# EAGLE board Sensor_post (EAGLE 7.6.0)

Size 160 x 100 mm. Coordinates in mm from the lower left corner, seen from the top.
Outline: 0,0 160,0 160,100 0,100 0,0
Copper layers (1*16): Top 0.035mm / dielectric 1.5mm / Bottom 0.035mm
Design rules "default": minimum track width 10mil, minimum drill 24mil, track to track 8mil, track to pad 8mil, pad to pad 8mil, via to via 8mil, smd to smd 8mil, copper to edge 40mil, drill to drill 8mil, minimum pad ring 10mil, minimum via ring 8mil, stop-mask expansion 4mil, vias tented up to drill 0mil, thermal gap 10mil

## Footprints (pad centres in the part's own frame; a part is rotated, then mirrored left to right if it is on the bottom)
E2,5-7 = drill 0.813 pad 1.778: + -1.27,0 | drill 0.813 pad 1.778 octagon: - 1.27,0
AB9V = drill 1.118 pad 3.15 octagon: + 0,2.54; - 0,-2.54
TO220V = drill 1.016 long: 1 -2.54,-2.54; 2 0,-2.54; 3 2.54,-2.54
NRF24L01 = drill 0.8: CE 3.75,3.75; CSN 1.25,3.75; IRQ 1.25,8.75; MISO 3.75,8.75; MOSI 1.25,6.25; SCK 3.75,6.25; VCC 1.25,1 | drill 0.8 square: GND 3.75,1
EG1218 = drill 0.9 pad 1.676: O -2.54,0; P 0,0; S 2.54,0
0207/10 = drill 0.813 pad 1.676 octagon: 1 -5.08,0; 2 5.08,0
CA9V = drill 1.321 long: A -2.54,-5.08; E 2.54,-5.08; S 0,5.08
10 = drill 0.813 pad 1.6 octagon: 1 -5.08,0; 2 5.08,0
NANO = drill 0.8 long: 3.3V -10.16,24.13; 5V -10.16,-1.27; A0 -10.16,19.05; A1 -10.16,16.51; A2 -10.16,13.97; A3 -10.16,11.43; A4 -10.16,8.89; A5 -10.16,6.35; A6 -10.16,3.81; A7 -10.16,1.27; AREF -10.16,21.59; D2 5.08,1.27; D3 5.08,3.81; D4 5.08,6.35; D5 5.08,8.89; D6 5.08,11.43; D7 5.08,13.97; D8 5.08,16.51; D9 5.08,19.05; D10 5.08,21.59; D11 5.08,24.13; D12 5.08,26.67; D13 -10.16,26.67; GND -10.16,-6.35; GND1 5.08,-1.27; RAW -10.16,-8.89; RST -10.16,-3.81; RST1 5.08,-3.81; RX1 5.08,-6.35; TX0 5.08,-8.89
LCD1602 = drill 0.8 long: 1 8,33.46; 2 10.54,33.46; 3 13.08,33.46; 4 15.62,33.46; 5 18.16,33.46; 6 20.7,33.46; 7 23.24,33.46; 8 25.78,33.46; 9 28.32,33.46; 10 30.86,33.46; 11 33.4,33.46; 12 35.94,33.46; 13 38.48,33.46; 14 41.02,33.46; 15 43.56,33.46; 16 46.1,33.46 | hole 2.8: 2.54,2.54; 2.54,33.46; 77.46,33.46; 77.46,2.54

## Placement (x,y rotation side)
C2  1uF  [E2,5-7]  -64.77,80.01 0 top  (outside the outline)
C3  1uF  [E2,5-7]  -74.93,80.01 0 top  (outside the outline)
C4  1uF  [E2,5-7]  -20.32,95.25 0 top  (outside the outline)
G1  11.1V  [AB9V]  -40.64,81.28 0 top  (outside the outline)
IC1  7809T  [TO220V]  -52.07,83.82 0 top  (outside the outline)
NRF24L1  NRF24L01  [NRF24L01]  -21.59,78.74 0 top  (outside the outline)
ON/OFF  [EG1218]  -30.48,93.98 0 top  (outside the outline)
R1  [0207/10]  -43.18,92.71 0 top  (outside the outline)
R2  [CA9V]  -27.94,83.82 0 top  (outside the outline)
SENSOR  J10MM  [10]  -55.88,92.71 0 top  (outside the outline)
U$1  NANO  [NANO]  -20.32,10.16 0 top  (outside the outline)
X1  HD44780LCD-1602  [LCD1602]  -93.98,39.37 0 top  (outside the outline)

## Library data of the parts
C2-C4 ON/OFF R1 X1 = adafruit
G1 = battery
IC1 = linear
NRF24L1 = nRF24L01
R2 = pot
SENSOR = jumper
U$1 = Arduino-clone

## Nets
3.3V: C4.+ NRF24L1.VCC U$1.3.3V
5V: R2.E SENSOR.2 U$1.5V X1.2 X1.15
9V: C2.+ IC1.3 U$1.RAW
CE: NRF24L1.CE U$1.D7
CSN: NRF24L1.CSN U$1.D8
D4: U$1.D2 X1.11
D5: U$1.D3 X1.12
D6: U$1.D4 X1.13
D7: U$1.D5 X1.14
E: U$1.D10 X1.6
GND: C2.- C3.- C4.- G1.- IC1.2 NRF24L1.GND ON/OFF.S R1.1 R2.A U$1.GND U$1.GND1 X1.1 X1.5 X1.16
MISO: NRF24L1.MISO U$1.D12
MOSI: NRF24L1.MOSI U$1.D11
N$1: C3.+ IC1.1 ON/OFF.P
N$2: R1.2 SENSOR.1 U$1.D6
N$3: R2.S X1.3
RS: U$1.D9 X1.4
SCK: NRF24L1.SCK U$1.D13
VCC: G1.+ ON/OFF.O

## Tracks (layer width: path | path; a pad name or v marks a point on that pad's centre or on a via)
3.3V  (2 unrouted)
5V  (4 unrouted)
9V  (2 unrouted)
CE  (1 unrouted)
CSN  (1 unrouted)
D4  (1 unrouted)
D5  (1 unrouted)
D6  (1 unrouted)
D7  (1 unrouted)
E  (1 unrouted)
GND  (13 unrouted)
MISO  (1 unrouted)
MOSI  (1 unrouted)
N$1  (2 unrouted)
N$2  (2 unrouted)
N$3  (1 unrouted)
RS  (1 unrouted)
SCK  (1 unrouted)
VCC  (1 unrouted)